# Allegro board Chassis_GND_REF.brd
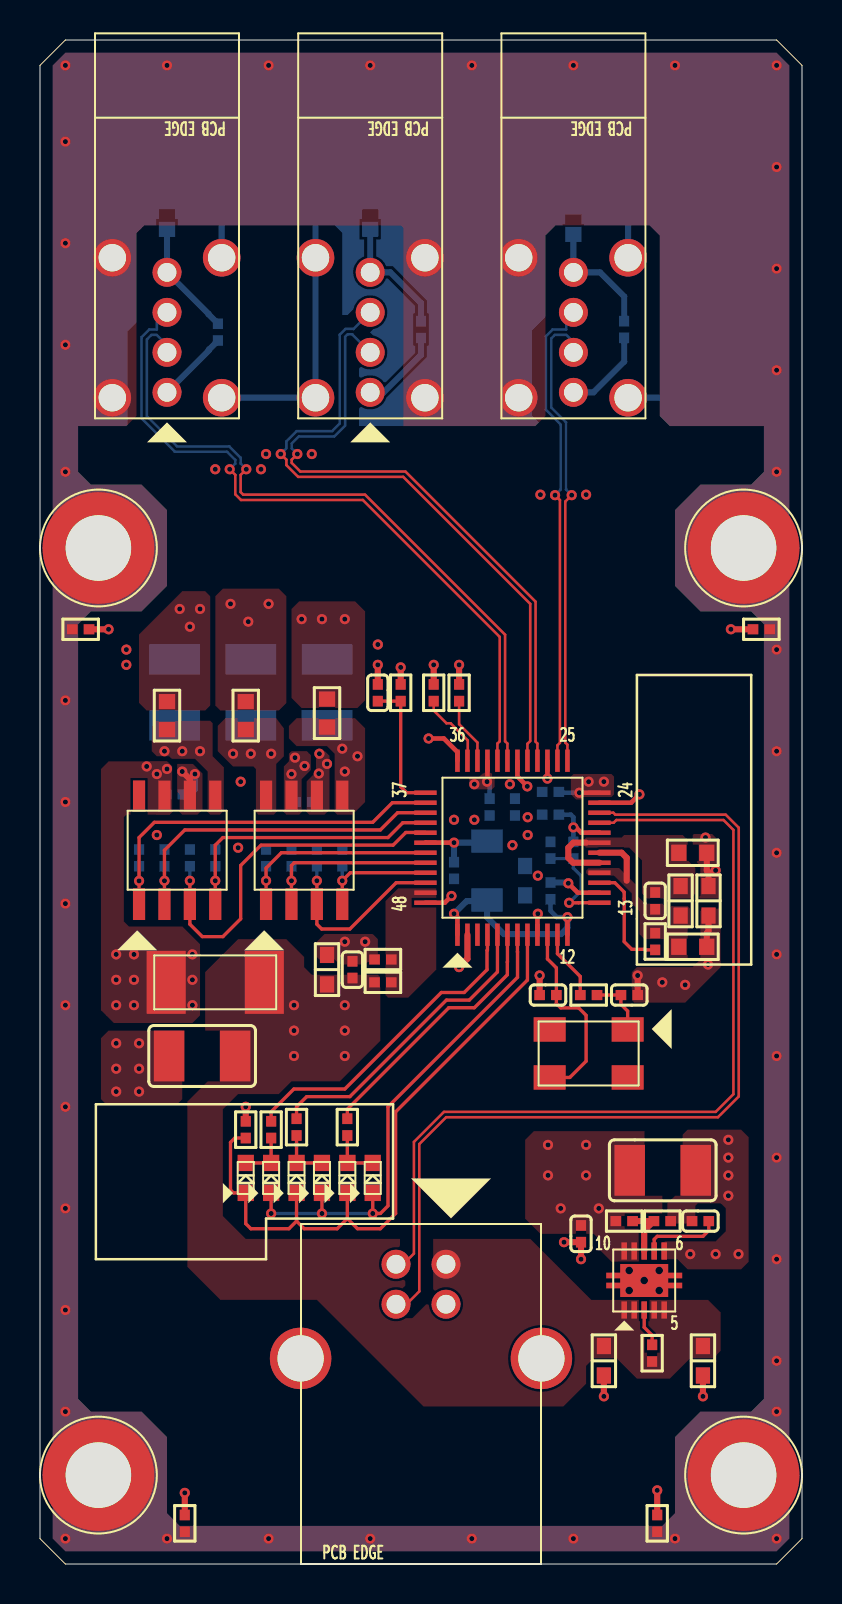
[diagram p0: board, top side]
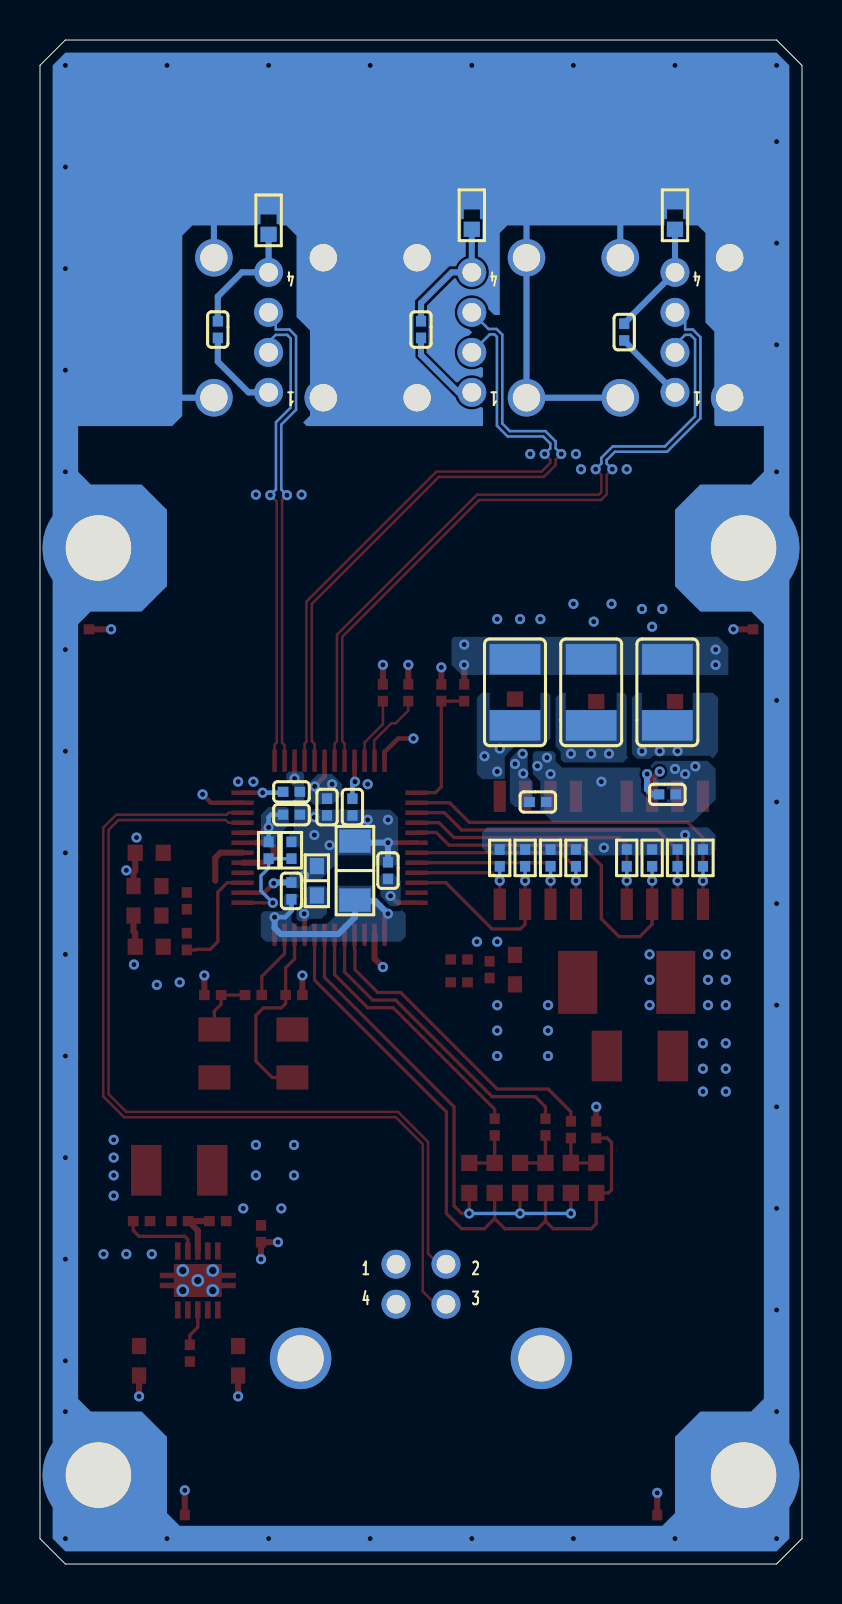
[diagram p1: board, bottom side, seen from below]

Outline 38.1 x 76.2 mm; copper layers: TOP, L2_GND, L3_PWR, BOTTOM. Coordinates in mm from the lower left corner of the outline.
Outline path: 0,74.93 0,1.27 1.27,0 36.83,0 38.1,1.27 38.1,74.93 36.83,76.2 1.27,76.2 0,74.93

## Design rules (mm)
net group USB_D1: nets USB_D1_N USB_D1_P
net group USB_D2: nets USB_D2_N USB_D2_P
net group USB_D3: nets USB_D3_N USB_D3_P
net group USB_D4: nets USB_D4_N USB_D4_P
net group USB_UP: nets USB_UP_N USB_UP_P
net group CLS_PWR: nets LDO_FB VDDOUT_2V5 VFIL1_5V0 VFIL2_5V0 VFIL3_5V0 VPORT1_5V0 VPORT2_5V0 VPORT3_5V0
net group CLS_SENSI: nets AVDD_2V5 AVSS_GND XTAL1 XTAL2 XTAL2_R

## Placement (name value [footprint] x y rotation side)
C1  12pF  [0402C]  25.4 28.45 0 top
C2  10uF  [0603C]  14.35 29.72 270 top
C3  1uF  [0402C]  15.62 29.72 270 top
C4  12pF  [0402C]  29.46 28.45 180 top
C5  1uF  [0402C]  29.21 61.72 270 bottom
C6  1uF  [0402C]  19.05 61.72 270 bottom
C7  10uF  [0603C]  24.26 34.16 270 bottom
C8  1uF  [0402C]  25.53 37.47 0 bottom
C9  1uF  [0402C]  23.75 37.85 90 bottom
C10  1uF  [0402C]  20.7 34.67 270 bottom
C11  1uF  [0402C]  8.89 61.59 270 bottom
C13  22uF  [1206C]  22.35 34.67 270 bottom
C14  4.7uF  [0603C]  33.43 33.16 90 top
C15  4.7uF  [0603C]  32.03 33.16 90 top
C16  1uF  [0402C]  30.76 33.16 90 top
C17  1uF  [0402C]  16.89 43.56 270 top
C18  1uF  [0402C]  13.21 38.1 180 bottom
C19  100uF  [1210C]  10.54 43.58 90 bottom
C20  100uF  [1210C]  14.35 43.58 90 bottom
C21  0.1uF  [0402C]  25.53 33.66 270 bottom
C22  0.1uF  [0402C]  25.53 38.61 0 bottom
C23  0.1uF  [0402C]  22.48 37.85 90 bottom
C24  1uF  [0402C]  6.73 38.48 180 bottom
C26  100uF  [1210C]  6.73 43.58 90 bottom
C27  100uF  [1210C]  8.11 25.4 180 top
C28  1uF  [0402C]  27.05 16.51 90 top
C29  100uF  [1210C]  31.14 19.68 0 top
C30  10uF  [0603C]  28.19 10.16 90 top
C31  10uF  [0603C]  33.15 10.16 90 top
C32  DNL_1n0F  [0402C]  33.02 17.14 0 top
CN1  USB_B_RECP  [MOLEX_670688011]  19.05 10.28 0 top
CN2  USB_A_VERT_RECP  [MOLEX_672983091]  26.67 58.58 180 top
CN3  USB_A_VERT_RECP  [MOLEX_672983091]  16.51 58.58 180 top
CN4  USB_A_VERT_RECP  [MOLEX_672983091]  6.35 58.58 180 top
D1  LED_GRN_0603  [SMTLED_0603]  16.64 19.3 90 top
D2  LED_GRN_0603  [SMTLED_0603]  15.37 19.3 90 top
D3  LED_GRN_0603  [SMTLED_0603]  14.1 19.3 90 top
D4  LED_GRN_0603  [SMTLED_0603]  12.83 19.3 90 top
D5  LED_GRN_0603  [SMTLED_0603]  11.56 19.3 90 top
D6  LED_GRN_0603  [SMTLED_0603]  10.29 19.3 90 top
F1  2A_125V  [FUSE_SMD]  8.76 29.08 180 top
FB1  60OHM_100MHZ_1A  [0603L]  32.64 35.56 180 top
FB2  60OHM_100MHZ_1A  [0603L]  32.64 30.86 180 top
FB4  60OHM_100MHZ_1A  [0603L]  14.35 42.55 90 top
FB5  60OHM_100MHZ_1A  [0603L]  6.35 67.44 270 bottom
FB6  60OHM_100MHZ_1A  [0603L]  10.29 42.42 90 top
FB7  60OHM_100MHZ_1A  [0603L]  16.51 67.44 270 bottom
FB8  60OHM_100MHZ_1A  [0603L]  26.67 67.18 270 bottom
FB9  60OHM_100MHZ_1A  [0603L]  6.35 42.42 90 top
MH1  DNL  [MH_129X220_PTH]  2.92 4.45 0 top
MH2  DNL  [MH_129X220_PTH]  35.18 4.45 0 top
MH3  DNL  [MH_129X220_PTH]  35.18 50.8 0 top
MH4  DNL  [MH_129X220_PTH]  2.92 50.8 0 top
NOREF  -  []  -149.86 -106.68 0 top
NOREF#2  -  []  -41.91 -34.29 0 top
R1  33.2  [0402R]  27.43 28.45 180 top
R2  10K  [0402R]  17.14 29.08 180 top
R3  15K  [0402R]  17.14 30.23 0 top
R4  0  [0402R]  26.67 35.69 90 bottom
R5  DNL_0  [0402R]  25.53 35.69 270 bottom
R6  10K  [0402R]  10.29 21.72 270 top
R7  470  [0402R]  15.37 21.84 90 top
R8  470  [0402R]  12.83 21.84 90 top
R9  470  [0402R]  11.56 21.72 90 top
R11  2.43K  [0402R]  30.76 31.13 90 top
R12  10K  [0402R]  18.03 43.56 90 top
R13  510K  [0402R]  15.11 35.31 90 bottom
R14  510K  [0402R]  11.3 35.31 90 bottom
R15  10K  [0402R]  13.84 35.31 90 bottom
R16  10K  [0402R]  12.57 35.31 90 bottom
R17  510K  [0402R]  8.76 35.31 90 bottom
R18  510K  [0402R]  4.95 35.31 90 bottom
R19  10K  [0402R]  7.49 35.31 90 bottom
R20  10K  [0402R]  6.22 35.31 90 bottom
R21  3.57K  [0402R]  29.21 17.14 180 top
R22  1.15K  [0402R]  31.11 17.14 180 top
R23  10K  [0402R]  30.61 10.54 270 top
R24  0  [0402R]  19.68 43.56 270 top
R25  0  [0402R]  20.95 43.56 270 top
R26  0  [0402R]  7.24 2.03 270 top
R27  0  [0402R]  30.86 2.03 270 top
R28  0  [0402R]  36.07 46.74 0 top
R29  0  [0402R]  2.03 46.74 180 top
U1  UPD720114_QFP  [NEC_TQFP_48]  23.62 35.81 0 top
U2  AP1212  [DIODES_SOP_8L]  13.21 35.69 0 top
U3  AP1212  [DIODES_SOP_8L]  6.86 35.69 0 top
U4  TPS74801  [TI_SON_10]  30.21 14.17 0 top
X1  30MHZ_50PPM  [XTAL_VXM5]  27.43 25.53 180 top

## Library data of the parts
C1 C4 = C_12PF_0402_50V_5P_1500-1206
C2 C7 C30 C31 = C_10UF_0603_6V3_20P_1500-1141
C3 C5 C6 C8-C11 C16-C18 C24 C28 = C_1UF_0402_6V3_10P_1500-1146
C13 = C_22UF_1206_6V3_10P_1500-1097
C14 C15 = C_4U7F_0603_6V3_15P_1500-1207
C19 C20 C26 C27 C29 = C_100UF_1210_6V3_20P_1500-1194
C21-C23 = C_0U1F_0402_16V_10P_1500-1135
C32 = C_0402_16V_20P_X7R_1n0F
CN1 = 3000-1393_USB_B_RECP
CN2-CN4 = 3000-1394_USB_A_VERT_RECP
D1-D6 = LED_0603_GRN_3100-1045
F1 = FUSE_2A_125V_NANO_2300-1027
FB1 FB2 FB4-FB9 = FB_0603_60OHM_1A_2100-1019
MH1-MH4 = MH_129x220_PTH
R1 = R_33R2_0402_1P_1000-1380
R2 R6 R12 R15 R16 R19 R20 R23 = R_10K_0402_1P_1000-1234
R3 = R_15K_0402_5P_1000-1505
R4 R5 R24-R29 = R_0_0402_5P_1000-1377
R7-R9 = R_470_0402_5P_1000-1506
R11 = R_2K43_0402_1P_1000-1503
R13 R14 R17 R18 = R_510K_0402_5P_1000-1504
R21 = R_3K57_0402_1P_1000-1344
R22 = R_1K15_0402_1P_1000-1345
U1 = 4000-1384_UPD720114_TQFP48
U2 U3 = 4000-1385_AP1212L_SOL8L
U4 = IC_TPS74801_SON10_3X3_ADJ_REG
X1 = XTAL_30MHZ_4P_VXM5_1900-1069

## Footprints (pads in the part's own frame, mm; a bottom-side part is the same pattern mirrored in y, then rotated)
0402C
  rect 0.533x0.508 smd: 1(0.419,0) 2(-0.419,0)
0402R
  rect 0.533x0.508 smd: 1(0.419,0) 2(-0.419,0)
0603C
  rect 0.813x0.711 smd: 1(0.737,0) 2(-0.737,0)
0603L
  rect 0.762x0.813 smd: 1(-0.7,0) 2(0.7,0)
1206C
  rect 1.168x1.575 smd: 1(1.473,0) 2(-1.473,0)
1210C
  rect 1.524x2.54 smd: 1(-1.651,0) 2(1.651,0)
DIODES_SOP_8L
  rect 0.61x1.575 smd: 1(-1.905,-2.7) 2(-0.635,-2.7) 3(0.635,-2.7) 4(1.905,-2.7) 5(1.905,2.7) 6(0.635,2.7) 7(-0.635,2.7) 8(-1.905,2.7)
FUSE_SMD
  rect 1.956x3.15 smd: 1(-2.451,0) 2(2.451,0)
MH_129X220_PTH
  round 5.588 hole 3.277: 1(0,0)
MOLEX_670688011
  round 1.448 hole 0.94: 1(1.25,4.71) 2(-1.25,4.71) 3(-1.25,2.71) 4(1.25,2.71)
  round 3.073 hole 2.311: 5(-6.02,0) 6(6.02,0)
MOLEX_672983091
  round 1.448 hole 0.94: 1(0,0) 2(0,-2) 3(0,-4) 4(0,-6)
  round 1.88 hole 1.372: 5(-2.735,0.27) 6(-2.735,-6.73) 7(2.735,-6.73) 8(2.735,0.27)
NEC_TQFP_48
  rect 0.229x1.118 smd: 1(-2.75,-4.35) 2(-2.25,-4.35) 3(-1.75,-4.35) 4(-1.25,-4.35) 5(-0.75,-4.35) 6(-0.25,-4.35) 7(0.25,-4.35) 8(0.75,-4.35) 9(1.25,-4.35) 10(1.75,-4.35) 11(2.25,-4.35) 12(2.75,-4.35) 25(2.75,4.35) 26(2.25,4.35) 27(1.75,4.35) 28(1.25,4.35) 29(0.75,4.35) 30(0.25,4.35) 31(-0.25,4.35) 32(-0.75,4.35) 33(-1.25,4.35) 34(-1.75,4.35) 35(-2.25,4.35) 36(-2.75,4.35)
  rect 1.118x0.229 smd: 13(4.35,-2.75) 14(4.35,-2.25) 15(4.35,-1.75) 16(4.35,-1.25) 17(4.35,-0.75) 18(4.35,-0.25) 19(4.35,0.25) 20(4.35,0.75) 21(4.35,1.25) 22(4.35,1.75) 23(4.35,2.25) 24(4.35,2.75) 37(-4.35,2.75) 38(-4.35,2.25) 39(-4.35,1.75) 40(-4.35,1.25) 41(-4.35,0.75) 42(-4.35,0.25) 43(-4.35,-0.25) 44(-4.35,-0.75) 45(-4.35,-1.25) 46(-4.35,-1.75) 47(-4.35,-2.25) 48(-4.35,-2.75)
SMTLED_0603
  rect 0.813x0.813 smd: 1(-0.749,0) 2(0.749,0)
TI_SON_10
  rect 0.279x0.864 smd: 1(-1,-1.475) 2(-0.5,-1.475) 3(0,-1.475) 4(0.5,-1.475) 5(1,-1.475) 6(1,1.475) 7(0.5,1.475) 8(0,1.475) 9(-0.5,1.475) 10(-1,1.475)
  custom 3.8x1.65 smd: 11(0,0)
XTAL_VXM5
  rect 1.6x1.219 smd: 1(-1.95,-1.2) 2(1.95,-1.2) 3(1.95,1.2) 4(-1.95,1.2)

## Nets
AVDD_2V5: C15.1 C16.1 FB1.2 U1.17(AVDD#17) U1.19(AVDD#19)
AVSS_GND: C15.2 C16.2 FB2.2 R11.1 U1.16(AVSS(R)) U1.18(AVSS)
GND: C1.2 C2.2 C3.2 C4.2 C5.2 C6.2 C7.2 C8.2 C9.2 C10.2 C11.2 C13.2 C14.2 C17.2 C18.2 C19.2 C20.2 C21.2 C22.2 C23.2 C24.2 C26.2 C27.2 C28.2 C29.2 C30.2 C31.2 C32.2 CN1.4(GND) CN1.5(FG1) CN1.6(FG2) CN2.4(GND) CN3.4(GND) CN4.4(GND) FB2.1 FB5.2 FB7.2 FB8.2 R3.2 R5.2 R6.2 R22.2 R24.2 R25.2 R26.2 R27.2 R28.2 R29.2 U1.2(VSSREG) U1.14(TEST) U1.23(VSS#23) U1.27(VSS#27) U1.36(VSS#36) U1.42(VSS#42) U2.6(GND) U3.6(GND) U4.6(GND) U4.11(PAD)
VBUS_5V0: C2.1 C3.1 C27.1 C30.1 C31.1 CN1.1(VBUS) F1.1 R2.1 R23.1 U4.1(VIN1) U4.2(VIN2) U4.4(BIAS) U4.5(EN)
VBUS_MON: R2.2 R3.1 U1.47(VBUSM)
VDD_3V3: C7.1 C8.1 C9.1 C10.1 C28.1 C29.1 R4.1 R12.1 R13.1 R14.1 R15.1 R16.1 R17.1 R18.1 R19.1 R20.1 R21.1 U1.9(VDD33#9) U1.20(VDD33#20) U1.30(VDD33#30) U1.48(VDD33REG) U4.9(VOUT2) U4.10(VOUT1)
VDDOUT_2V5: C13.1 C14.1 C21.1 C22.1 C23.1 FB1.1 U1.1(VDD25OUT) U1.12(VDD25#12) U1.24(VDD25#24) U1.33(VDD25#33)
BUS_B: R4.2 R5.1 U1.13(BUS_B)
CHASSIS_GND: CN2.5(FG1) CN2.6(FG2) CN2.7(FG3) CN2.8(FG4) CN3.5(FG1) CN3.6(FG2) CN3.7(FG3) CN3.8(FG4) CN4.5(FG1) CN4.6(FG2) CN4.7(FG3) CN4.8(FG4) FB5.1 FB7.1 FB8.1 MH1.1 MH2.1 MH3.1 MH4.1 R26.1 R27.1 R28.1 R29.1
LDO_FB: R21.2 R22.1 U4.8(FB)
LDO_PG: R23.2 U4.3(PGD)
LDO_SS: C32.1 U4.7(SS)
LED1: R7.1 U1.6(LED1)
LED1_R: D1.2(CATHODE) D2.2(CATHODE) R7.2
LED2: R8.1 U1.5(LED2)
LED2_R: D3.2(CATHODE) D4.2(CATHODE) R8.2
LED3: R9.1 U1.4(LED3)
LED3_R: D5.2(CATHODE) D6.2(CATHODE) R9.2
LED_AMBER: D2.1(ANODE) D4.1(ANODE) D6.1(ANODE) R6.1 U1.8(AMBER)
LED_GREEN: D1.1(ANODE) D3.1(ANODE) D5.1(ANODE) U1.7(GREEN)
RREF: R11.2 U1.15(RREF)
SYSRST_L: C17.1 R12.2 U1.37(SYSRSTB)
USB1_CS_L: R15.2 U1.46(CSB1) U2.3(FLG2)
USB1_EN_L: R13.2 U1.45(PPB1) U2.4(EN2_L)
USB2_CS_L: R16.2 U1.44(CSB2) U2.2(FLG1)
USB2_EN_L: R14.2 U1.43(PPB2) U2.1(EN1_L)
USB3_CS_L: R19.2 U1.41(CSB3) U3.3(FLG2)
USB3_EN_L: R17.2 U1.40(PPB3) U3.4(EN2_L)
USB4_CS_L: R20.2 U1.39(CSB4) U3.2(FLG1)
USB4_EN_L: R18.2 U1.38(PPB4) U3.1(EN1_L)
USB_D1_N: CN2.2(D_N) U1.25(DM1)
USB_D1_P: CN2.3(D_P) U1.26(DP1)
USB_D2_N: CN3.2(D_N) U1.28(DM2)
USB_D2_P: CN3.3(D_P) U1.29(DP2)
USB_D3_N: CN4.2(D_N) U1.31(DM3)
USB_D3_P: CN4.3(D_P) U1.32(DP3)
USB_D4_N: R25.1 U1.34(DM4)
USB_D4_P: R24.1 U1.35(DP4)
USB_UP_N: CN1.2(D_N) U1.21(DMU)
USB_UP_P: CN1.3(D_P) U1.22(DPU)
VFIL1_5V0: C5.1 CN2.1(VBUS) FB4.2
VFIL2_5V0: C6.1 CN3.1(VBUS) FB6.2
VFIL3_5V0: C11.1 CN4.1(VBUS) FB9.2
VPORT1_5V0: C20.1 FB4.1 U2.5(OUT2)
VPORT2_5V0: C19.1 FB6.1 U2.8(OUT1)
VPORT3_5V0: C26.1 FB9.1 U3.5(OUT2)
VPORT_5V0: C18.1 C24.1 F1.2 U2.7(IN) U3.7(IN)
XTAL1: C1.1 U1.10(X1) X1.3(X2)
XTAL2: R1.1 U1.11(X2)
XTAL2_R: C4.1 R1.2 X1.1(X1)

Pads without a net: U1 3; U3 8; X1 2 4

## Via types
v1: diameter 0.508, hole 0.254, TOP to BOTTOM, 180 vias
v2: diameter 0.635, hole 0.381, TOP to BOTTOM, 5 vias

## Routing (per net, layer and track width the routed paths; a pad name or vN(x,y) marks a point on that pad's centre or on a via; arc(x,y) is an arc through that point)
AVDD_2V5: length 3.2
  TOP w0.305: U1.17 26.66,35.06 26.42,35.31 26.42,35.81 26.67,36.07 27.3,36.07
AVSS_GND: length 2.6
  TOP w0.305: U1.18 29.08,35.56 29.34,35.31 29.34,34.16
GND: length 50.2
  TOP w0.229: v1(19.43,41.27) 20.19,41.27 20.87,40.6 U1.36 ; U1.27 v1(25.37,39.27) ; U1.23 29.55,38.06 v1(29.97,38.48) ; U1.14 26.89,33.56 v1(26.42,34.04) ; v1(20.7,36.07) 19.28,36.07 U1.42
  TOP w0.305: v1(7.11,39.62) 7.49,39.24 U3.6 ; R25.2 v1(20.95,44.96) ; C31.2 v1(33.15,8.38) ; C4.2 v1(29.88,29.43) ; C30.2 v1(28.19,8.38) ; R6.2 v1(10.29,22.86) ; R29.2 v1(3.43,46.74) ; U1.2 21.37,30.26 v1(20.95,29.84) ; C14.2 33.43,31.63 33.34,31.55 FB2.1 ; R28.2 v1(34.54,46.74) ; v1(27.05,15.24) C28.2 v1(26.2,16.09) ; R27.2 v1(30.86,3.68) ; R26.2 v1(7.24,3.56) ; C17.2 v1(16.89,44.96) ; C1.2 v1(24.98,29.43) ; R24.2 v1(19.68,44.96)
  BOTTOM w0.305: C10.2 v1(20.7,36.07) 22.28,36.07 C13.2 ; FB5.2 CN4.4 8.44,62.49 8.44,62.48 8.89,62.03 C11.2 ; FB7.2 CN3.4 17.51,64.58 19.05,63.05 C6.2 ; FB8.2 CN2.4 28,64.58 29.21,63.37 C5.2 ; C24.2 7.49,38.48 7.75,38.73 v1(7.75,39.5) ; C21.2 26.38,34.07 v1(26.42,34.04)
  vias: v1(3.81,26.04) v1(3.81,24.77) v1(3.81,23.62) v1(4.32,45.72) v1(4.32,44.96) v1(4.95,26.04) v1(4.95,24.77) v1(4.95,23.62) v1(8.76,54.74) v1(11.05,54.74) v1(11.3,55.5) v1(13.59,55.5) v1(13.94,39.52) v1(13.97,40.51) v1(14.35,40.01) v1(15.24,31.11) v1(16.26,31.11) v1(16.89,45.97) v1(20.7,37.21) v1(21.72,37.21) v1(23.62,35.94) v1(24.38,37.34) v1(24.38,36.45) v1(24.89,34.42) v1(25.02,53.47) v1(27.3,53.47) v1(31.11,29.08) v1(32.26,28.96) v1(32.51,15.49) v1(33.4,29.97) v1(33.78,15.49) v1(34.42,21.21) v1(34.42,20.32) v1(34.42,19.43) v1(34.42,18.41) v1(34.92,15.49) v2(29.46,14.68) v2(29.46,13.67) v2(30.21,14.17) v2(30.96,14.68) v2(30.96,13.67)
VBUS_5V0:
  vias: v1(12.7,27.94) v1(12.7,26.67) v1(12.7,25.4) v1(15.24,27.94) v1(15.24,26.67) v1(15.24,25.4)
VDD_3V3: length 8.3
  TOP w0.229: U1.48 20.24,33.06 v1(20.57,33.4) ; v1(24.36,38.88) 23.87,39.37 U1.30 ; v1(24.89,32.51) 24.87,32.49 U1.9 ; U1.20 27.97,36.57 27.06,36.57 26.8,36.83 v1(26.67,36.83)
  TOP w0.305: R12.1 v1(18.03,44.83)
  BOTTOM w0.229: C8.1 26.54,37.47 26.67,37.34 v1(26.67,36.83) R4.1
  vias: v1(5.84,36.45) v1(9.91,35.81) v1(23.5,38.99) v1(25.4,20.95) v1(25.4,19.43) v1(26.04,17.78) v1(27.3,20.95) v1(27.3,19.43) v1(27.94,17.78)
VDDOUT_2V5: length 17.1
  TOP w0.229: U1.1 20.87,32.34 v1(20.7,32.51) ; U1.24 v1(26.97,38.56) ; U1.33 22.37,39.26 22.35,39.24 v1(22.35,39.12) ; U1.12 v1(26.37,32.34)
  TOP w0.305: C14.1 33.43,34.58 33.34,34.67 FB1.1
  BOTTOM w0.229: C23.1 22.48,38.99 v1(22.35,39.12) ; v1(26.97,38.56) 25.99,38.56 C22.1 ; v1(26.37,32.34) 25.84,32.34 25.53,32.65 C21.1
  BOTTOM w0.305: v1(26.37,32.34) 26.37,31.81 26.06,31.5 23.19,31.5 22.35,32.33 C13.1 22.3,33.15 21.34,33.15 v1(20.7,32.51)
  vias: v1(21.72,38.99) v1(27.43,39.12) v1(28.19,39.12) v1(33.27,36.32) v1(33.78,34.68)
BUS_B: length 5.3
  TOP w0.165: v1(26.46,33.06) 26.92,33.06 26.92,33.06 U1.13
  BOTTOM w0.165: v1(26.46,33.06) 27.05,33.66 27.05,34.41 26.67,34.79 R4.2 R5.1
CHASSIS_GND: length 22.5
  BOTTOM w0.305: 9.07,68 9.09,67.98 CN4.6 ; 32.16,58.17 32.01,58.31 CN2.5 ; CN4.5 CN3.8 CN3.7 13.77,67.91 13.77,67.92 ; CN2.6 29.41,67.95 29.34,68.02
  vias: v1(1.27,74.93) v1(1.27,71.12) v1(1.27,66.04) v1(1.27,60.96) v1(1.27,54.61) v1(1.27,43.18) v1(1.27,38.1) v1(1.27,33.02) v1(1.27,27.94) v1(1.27,22.86) v1(1.27,17.78) v1(1.27,12.7) v1(1.27,7.62) v1(1.27,1.27) v1(6.35,74.93) v1(6.35,1.27) v1(11.43,74.93) v1(11.43,1.27) v1(16.51,74.93) v1(16.51,1.27) v1(21.59,74.93) v1(21.59,1.27) v1(26.67,74.93) v1(26.67,1.27) v1(31.75,74.93) v1(31.75,1.27) v1(36.83,74.93) v1(36.83,69.85) v1(36.83,64.77) v1(36.83,59.69) v1(36.83,54.61) v1(36.83,45.72) v1(36.83,40.64) v1(36.83,35.56) v1(36.83,30.48) v1(36.83,25.4) v1(36.83,20.32) v1(36.83,15.24) v1(36.83,10.16) v1(36.83,7.62) v1(36.83,1.27)
LDO_FB: length 2.8
  TOP w0.305: U4.8 30.21,16.66 30.23,16.68 30.23,16.69 30.68,17.14 ; 30.68,17.14 R22.1 ; 30.68,17.14 R21.2
LDO_PG: length 1.9
  TOP w0.165: R23.2 30.61,11.44 30.21,11.83 U4.3
LDO_SS: length 4
  TOP w0.165: U4.7 30.71,16.23 30.86,16.38 33.15,16.38 33.4,16.64 33.4,16.64 33.44,16.68 C32.1
LED1: length 13.3
  TOP w0.165: R7.1 15.37,22.74 20.44,27.81 21.72,27.81 23.37,29.46 23.37,30.1 23.37,30.1 U1.6
LED1_R: length 2.6
  TOP w0.165: D1.2 D2.2 R7.2
LED2: length 15.3
  TOP w0.165: U1.5 22.87,29.6 21.46,28.19 20.32,28.19 15.49,23.37 13.34,23.37 12.83,22.86 R8.1
LED2_R: length 2.6
  TOP w0.165: D3.2 D4.2 R8.2
LED3: length 16
  TOP w0.165: U1.4 22.37,30.7 22.35,30.68 22.35,29.72 21.21,28.57 20.07,28.57 15.24,23.75 12.69,23.75 11.56,22.61 R9.1
LED3_R: length 2.5
  TOP w0.165: D6.2 D5.2 R9.2
LED_AMBER: length 33.6
  TOP w0.165: 15.37,17.27 15.88,16.76 17.02,16.76 17.78,17.53 17.78,22.61 24.37,29.2 U1.8 ; 15.37,17.27 D2.1 ; 15.37,17.27 14.86,16.76 13.21,16.76 12.83,17.14 ; D4.1 12.83,17.14 ; 12.83,17.14 12.45,16.76 10.54,16.76 10.29,17.02 D6.1 9.67,18.55 9.53,18.7 9.53,21.08 9.74,21.3 R6.1
LED_GREEN: length 25.3
  TOP w0.165: U1.7 23.87,30.61 23.88,30.61 23.88,29.34 17.4,22.86 17.4,17.91 17.02,17.53 16.89,17.53 v1(16.64,17.53) D1.1 ; D5.1 v1(11.56,17.53) ; D3.1 v1(14.1,17.53)
  BOTTOM w0.165: v1(11.56,17.53) v1(14.1,17.53) v1(16.64,17.53)
RREF: length 5.6
  TOP w0.165: U1.15 28.74,34.06 29.21,33.59 29.21,33.27 29.21,31.11 29.59,30.73 30.27,30.73 30.3,30.71 R11.2
SYSRST_L: length 6.8
  TOP w0.165: U1.37 19.27,38.57 18.33,38.57 18.03,38.86 R12.2 C17.1
USB1_CS_L: length 9.4
  TOP w0.165: v1(13.84,34.16) U2.3 13.84,31.99 14.08,31.75 15.49,31.75 17.81,34.06 U1.46
  BOTTOM w0.165: v1(13.84,34.16) R15.2
USB1_EN_L: length 6.2
  TOP w0.165: U1.45 15.51,34.56 v1(15.11,34.16) U2.4
  BOTTOM w0.165: R13.2 v1(15.11,34.16)
USB2_CS_L: length 9.4
  TOP w0.165: U2.2 v1(12.57,34.16) 12.57,34.92 12.71,35.06 U1.44
  BOTTOM w0.165: v1(12.57,34.16) R16.2
USB2_EN_L: length 10.8
  TOP w0.165: U2.1 v1(11.3,34.16) 11.3,34.8 12.07,35.56 U1.43
  BOTTOM w0.165: v1(11.3,34.16) R14.2
USB3_CS_L: length 18.7
  TOP w0.165: v1(7.49,34.16) U3.3 7.49,31.99 8.11,31.37 9.14,31.37 10.03,32.26 10.03,34.92 11.05,35.94 17.65,35.94 18.29,36.58 19.26,36.58 U1.41
  BOTTOM w0.165: v1(7.49,34.16) R19.2
USB3_EN_L: length 14.7
  TOP w0.165: U3.4 v1(8.76,34.16) 8.76,35.94 9.14,36.32 17.4,36.32 18.14,37.06 U1.40
  BOTTOM w0.165: v1(8.76,34.16) R17.2
USB4_CS_L: length 17.3
  TOP w0.165: U1.39 17.88,37.56 17.02,36.7 7.24,36.7 6.22,35.69 v1(6.22,34.16) U3.2
  BOTTOM w0.165: v1(6.22,34.16) R20.2
USB4_EN_L: length 19.1
  TOP w0.165: U3.1 v1(4.95,34.16) 4.95,36.32 5.71,37.08 16.64,37.08 17.62,38.06 U1.38
  BOTTOM w0.165: v1(4.95,34.16) R18.2
USB_D1_N: length 23.6
  TOP w0.127: U1.25 26.37,40.96 26.26,41.07 26.26,53.12 v1(26.58,53.44)
  BOTTOM w0.127: CN2.2 26.67,61.1 26.31,61.46 25.74,61.46 25.57,61.28 25.57,57.82 26.3,57.08 26.3,53.72 v1(26.58,53.44)
USB_D1_P: length 24
  TOP w0.127: v1(25.75,53.44) 26,53.2 26,41.06 25.87,40.93 U1.26
  BOTTOM w0.127: v1(25.75,53.44) 26.04,53.72 26.04,56.97 25.3,57.71 25.3,61.39 25.63,61.72 26.31,61.72 26.31,62.23 CN2.3
USB_D2_N: length 33.4
  TOP w0.127: v1(12.87,55.5) 12.59,55.22 12.59,55.05 13.02,54.62 18.27,54.62 24.78,48.12 24.78,41.12 24.87,41.02 U1.28
  BOTTOM w0.127: v1(12.87,55.5) 12.59,55.78 12.59,56.02 12.94,56.38 14.72,56.38 15.25,56.91 15.25,61.36 15.38,61.49 15.61,61.49 CN3.2
USB_D2_P: length 33.9
  TOP w0.127: U1.29 24.37,41.01 24.51,41.15 24.51,48.01 18.16,54.36 12.91,54.36 12.32,54.94 12.32,55.22 v1(12.04,55.5)
  BOTTOM w0.127: v1(12.04,55.5) 12.32,55.78 12.32,56.13 12.83,56.64 14.61,56.64 14.99,57.02 14.99,61.47 15.27,61.75 15.68,61.75 CN3.3
USB_D3_N: length 35.5
  TOP w0.127: v1(10.32,54.74) 10.03,54.45 10.03,53.59 10.16,53.47 16.25,53.47 23.25,46.47 23.25,41.14 23.37,41.02 U1.31
  BOTTOM w0.127: CN4.2 6.35,60.95 5.84,61.46 5.57,61.46 5.35,61.23 5.35,57.39 6.85,55.88 9.46,55.88 10.03,55.31 10.03,55.02 v1(10.32,54.74)
USB_D3_P: length 36
  TOP w0.127: U1.32 22.87,41.02 22.99,41.14 22.99,46.35 16.14,53.2 10.05,53.2 9.77,53.48 9.77,54.45 v1(9.48,54.74)
  BOTTOM w0.127: v1(9.48,54.74) 9.77,55.02 9.77,55.2 9.35,55.61 6.74,55.61 5.08,57.28 5.08,61.34 5.46,61.72 5.84,61.72 5.84,62.07 CN4.3
USB_D4_N: length 3.4
  TOP w0.127: U1.34 21.87,41.07 20.95,41.99 R25.1
USB_D4_P: length 3.8
  TOP w0.127: U1.35 21.39,40.18 21.39,41.18 20.53,42.04 20.32,42.04 19.68,42.67 R24.1
USB_UP_N: length 43.8
  TOP w0.127: U1.21 28.68,37.06 28.82,37.2 34.18,37.2 34.67,36.7 34.67,23.49 33.79,22.61 20.2,22.61 18.7,21.1 18.7,15.52 18.16,14.99 CN1.2
USB_UP_P: length 46.5
  TOP w0.127: CN1.3 18.32,12.99 18.96,13.63 18.96,20.99 20.31,22.34 33.9,22.34 34.94,23.38 34.94,36.81 34.29,37.47 28.76,37.47 28.67,37.56 U1.22
VFIL1_5V0: length 4.4
  BOTTOM w0.305: C5.1 29.21,60.12 27.67,58.58 CN2.1
  vias: v1(13.08,47.24) v1(14.1,47.24) v1(15.24,47.24)
VFIL2_5V0: length 4.2
  BOTTOM w0.305: CN3.1 17.18,58.58 19.05,60.45 C6.1
  vias: v1(9.53,48.01) v1(10.41,47.12) v1(11.43,48.01)
VFIL3_5V0: length 3.6
  BOTTOM w0.305: C11.1 8.89,61.16 8.44,60.71 8.44,60.67 CN4.1
  vias: v1(6.99,47.75) v1(7.49,46.86) v1(8,47.75)
VPORT1_5V0:
  vias: v1(15.11,40.77) v1(15.24,39.62) v1(15.88,40.39)
VPORT2_5V0:
  vias: v1(9.65,40.51) v1(10.54,40.51) v1(11.56,40.51)
VPORT3_5V0:
  vias: v1(6.22,40.64) v1(7.11,40.64) v1(8,40.64)
VPORT_5V0:
  vias: v1(3.81,30.48) v1(3.81,29.21) v1(3.81,27.94) v1(4.7,30.48) v1(4.7,29.21) v1(4.7,27.94) v1(5.33,39.88) v1(5.84,39.5) v1(6.35,39.75) v1(7.62,30.48) v1(7.62,29.21) v1(7.62,27.94) v1(10.03,39.12) v1(12.57,39.5) v1(12.75,40.32) v1(13.23,39.9)
XTAL1: length 9.8
  TOP w0.165: U1.10 25.37,30.25 25.82,29.81 C1.1 25.82,28.02 26.04,27.81 26.93,27.81 27.3,27.43 27.3,25.14 26.49,24.33 X1.3
XTAL2: length 3.5
  TOP w0.165: R1.1 27.01,29.38 25.87,30.52 U1.11
XTAL2_R: length 3.1
  TOP w0.165: R1.2 C4.1 29.04,27.98 29.38,27.65 X1.1

## Copper pours and planes (outline as drawn; the poured copper is in the pictures)
AVDD_2V5 on TOP: 27.3,35.81 29.46,35.81 30.1,35.18 30.1,33.53 30.35,33.27 32.51,33.27 32.77,33.53 32.77,34.8 32.38,35.18 32.38,36.2 32.13,36.45 29.21,36.45 29.08,36.32 27.3,36.32 27.18,36.2 27.18,35.94
AVSS_GND on TOP: 27.43,34.42 28.7,34.42 29.59,33.53 29.59,33.02 29.97,32.64 29.97,31.5 30.23,31.24 31.24,31.24 31.37,31.11 31.37,30.35 31.62,30.1 32.26,30.1 32.38,30.23 32.38,31.75 32.51,31.88 32.51,32.77 32.38,32.89 31.24,32.89 31.11,33.02 30.35,33.02 29.97,33.4 29.97,33.78 28.96,34.8 27.43,34.8 27.3,34.67 27.3,34.54
GND on TOP: 13.34,39.37 13.34,37.59 13.46,37.47 14.22,37.47 14.48,37.72 14.48,39.24 14.61,39.37 14.61,40.39 14.22,40.77 13.84,40.77 13.72,40.64 13.72,39.75
GND on TOP: 31.11,16 31.11,15.37 31.24,15.24 31.88,15.24 32.38,14.73 35.05,14.73 35.43,15.11 35.43,18.54 33.91,18.54 33.91,18.16 34.29,17.78 34.29,16.64 33.78,16.13 31.24,16.13
GND on TOP: 32.13,18.41 32.13,21.46 32.38,21.72 35.05,21.72 35.43,21.34 35.43,18.54 34.92,18.03 32.89,18.03 32.77,17.91 32.77,17.02 31.37,17.02 31.37,18.03 31.75,18.41
GND on TOP: 33.02,32.64 33.02,30.23 32.64,29.84 29.84,29.84 29.59,29.59 29.59,28.19 29.72,28.07 32.26,28.07 34.04,29.84 34.04,32.64 33.91,32.77 33.15,32.77
GND on TOP: 13.97,30.23 14.73,30.23 14.99,29.97 16.26,29.97 16.38,30.1 16.89,30.1 16.89,31.24 16.64,31.5 14.22,31.5 13.84,31.11 13.84,30.35
GND on TOP: 6.99,38.48 6.99,37.59 7.11,37.47 7.87,37.47 8.13,37.72 8.13,39.62 7.62,40.13 6.99,40.13 6.86,40.01 6.86,38.61
GND on TOP: 3.43,26.67 7.11,26.67 7.11,23.24 6.86,22.99 3.3,22.99 3.05,23.24 3.05,26.29
GND on BOTTOM: 20.19,37.34 20.19,35.05 20.32,34.92 23.37,34.92 24.13,34.16 24.77,34.16 25.15,33.78 25.65,33.78 25.65,34.42 25.4,34.67 25.15,34.67 25.02,34.8 25.02,35.69 25.27,35.94 25.65,35.94 25.65,36.45 25.4,36.7 25.4,38.23 25.27,38.35 25.27,38.73 25.78,39.24 25.78,39.5 25.65,39.62 25.02,39.62 24.89,39.5 24.89,37.97 24.64,37.72 20.57,37.72
GND on BOTTOM: 13.72,40.51 13.72,39.37 13.46,39.12 13.46,37.85 14.35,37.85 14.61,38.1 14.61,40.26 14.22,40.64 13.84,40.64
GND on BOTTOM: 3.68,45.85 3.68,44.45 17.02,44.45 17.53,44.96 17.53,46.23 17.4,46.35 4.19,46.35
GND on L2_GND: 7.62,2.54 6.99,3.17 6.99,6.99 5.71,8.26 3.17,8.26 2.54,8.89 2.54,46.35 3.17,46.99 5.08,46.99 6.99,48.9 6.99,53.34 5.71,54.61 3.17,54.61 2.54,55.24 2.54,55.88 3.17,56.52 4.45,56.52 4.83,56.9 4.83,65.13 5.74,66.04 6.99,66.04 7.62,65.41 7.62,56.52 8.26,55.88 14.61,55.88 14.99,56.26 14.99,65.02 15.75,65.79 17.27,65.79 17.78,65.28 17.78,55.88 24.77,55.88 25.15,56.26 25.15,64.87 26.31,66.04 29.84,66.04 30.48,65.41 30.48,57.15 31.11,56.52 34.92,56.52 35.56,55.88 35.56,55.24 34.92,54.61 32.38,54.61 31.11,53.34 31.11,48.26 32.38,46.99 34.92,46.99 35.56,46.35 35.56,8.89 34.92,8.26 32.38,8.26 31.11,6.99 31.11,3.17 30.48,2.54
VBUS_5V0 on TOP: 8.26,26.04 8.26,29.59 9.91,31.24 12.32,31.24 13.21,30.35 13.21,29.84 13.59,29.46 16.89,29.46 17.02,29.34 17.02,26.16 14.99,24.13 12.57,24.13 11.94,23.5 9.91,23.5 9.14,22.73 9.14,17.4 10.29,16.26 24.51,16.26 27.56,13.21 33.4,13.21 34.04,12.57 34.04,10.67 33.66,10.29 32.51,10.29 31.5,9.27 29.84,9.27 28.83,10.29 27.69,10.29 27.3,9.91 27.3,9.02 26.16,7.87 19.18,7.87 13.84,13.21 9.02,13.21 7.37,14.86 7.37,23.11 8.38,24.13 8.38,25.91
VBUS_5V0 on L3_PWR: 19.81,13.97 21.21,13.97 22.23,14.99 22.23,20.07 17.14,25.15 17.14,27.81 16,28.96 12.19,28.96 11.56,28.32 11.56,24.64 16.76,19.43 17.78,19.43 19.18,18.03 19.18,14.61
VBUS_MON on TOP: 17.4,28.32 17.27,28.45 17.27,33.15 17.91,33.78 19.81,33.78 19.81,29.72 18.41,28.32
VDD_3V3 on TOP: 28.57,15.11 27.94,15.75 27.94,16.26 27.69,16.51 25.02,16.51 24.26,17.27 24.26,21.21 24.89,21.84 30.23,21.84 30.23,20.95 30.48,20.7 31.11,20.7 31.11,16.64 30.99,16.51 30.73,16.51 30.48,16.26 30.48,15.24 30.35,15.11
VDD_3V3 on BOTTOM: 4.57,35.43 15.62,35.43 16,35.81 16,36.58 15.75,36.83 4.7,36.83 4.32,36.45 4.32,35.69
VDD_3V3 on BOTTOM: 20.07,34.16 20.45,34.54 20.95,34.54 21.08,34.42 21.08,33.4 20.57,32.89 20.19,32.89 20.07,33.02
VDD_3V3 on BOTTOM: 22.99,38.48 23.5,37.97 24,37.97 24.01,37.97 24.43,37.97 24.64,38.18 24.64,39.07 24.21,39.5 23.5,39.5 22.99,38.99
VDD_3V3 on BOTTOM: 23.75,33.78 23.75,32.53 24.02,32.26 24.64,32.26 24.77,32.13 25.15,32.13 25.27,32.26 25.27,32.89 24.77,33.4 24.77,33.78 24.64,33.91 23.88,33.91
VDD_3V3 on BOTTOM: 25.65,37.72 25.65,36.96 26.29,36.33 26.29,35.94 26.42,35.81 26.92,35.81 27.05,35.94 27.05,37.47 26.67,37.85 25.78,37.85
VDD_3V3 on L3_PWR: 14.87,50.7 14.97,51.07 15.34,51.17 15.37,51.16 16.79,52.58 31.11,52.58 31.11,48.26 32.38,46.99 34.92,46.99 35.56,46.35 35.56,8.89 34.92,8.26 32.38,8.26 31.11,6.99 31.11,3.17 30.48,2.54 7.62,2.54 6.99,3.17 6.99,6.99 5.71,8.26 3.17,8.26 2.54,8.89 2.54,46.35 3.17,46.99 5.08,46.99 6.99,48.9 6.99,52.58 8.76,52.58 8.76,50.9 8.83,50.8 8.94,50.83 10.69,52.58 13.19,52.58 12.57,51.96 12.57,51.28 12.61,51.21 12.68,51.18 13.08,50.8 12.68,50.42 12.61,50.39 12.57,50.32 12.57,48.61 12.64,48.52 12.75,48.54 14.88,50.67
VDDOUT_2V5 on TOP: 32.64,36.45 32.64,35.05 32.89,34.8 32.89,33.4 33.02,33.27 34.04,33.27 34.16,33.4 34.16,35.94 33.53,36.58 32.77,36.58
VDDOUT_2V5 on TOP: 22.23,40.77 22.48,40.77 22.61,40.64 22.61,39.37 22.73,39.24 22.73,38.86 22.61,38.73 21.59,38.73 21.46,38.86 21.46,39.24 21.59,39.37 21.97,39.37 22.23,39.62
VDDOUT_2V5 on TOP: 28.57,38.35 27.18,38.35 27.05,38.23 26.8,38.23 26.54,38.48 26.54,39.37 26.67,39.5 28.57,39.5 28.7,39.37 28.7,38.48
VDDOUT_2V5 on BOTTOM: 20.07,32.77 20.45,32.77 21.34,33.66 21.34,33.93 21.44,34.03 23.24,34.03 23.37,33.91 23.37,32.38 23.75,32 25.15,32 25.4,32.26 25.4,32.89 25.15,33.15 25.15,33.4 25.27,33.53 25.78,33.53 25.91,33.4 25.91,32.77 26.04,32.64 26.92,32.64 27.06,32.5 27.06,31.37 26.8,31.11 20.07,31.11 19.81,31.37 19.81,32.51
VDDOUT_2V5 on L3_PWR: 19.81,32.51 19.81,31.24 20.57,30.48 32.38,30.48 34.29,32.38 34.29,35.94 28.7,41.53 23.5,41.53 21.46,39.5 21.46,38.87 21.59,38.73 22.48,38.73 23.5,39.75 25.91,39.75 26.54,39.12 26.54,38.23 26.67,38.1 28.45,38.1 28.45,33.78 27.43,32.77 26.16,32.77 25.27,31.88 24.13,31.88 23.24,32.77 20.07,32.77
CHASSIS_GND on BOTTOM (solid shape): 37.47,74.93 37.47,1.27 36.83,0.64 1.27,0.64 0.64,1.27 0.64,56.9 1.91,56.9 1.91,54.61 2.54,53.98 5.08,53.98 6.35,52.7 6.35,48.9 5.08,47.62 2.54,47.62 1.91,46.99 1.91,8.26 2.54,7.62 5.08,7.62 6.35,6.35 6.35,2.54 6.99,1.91 31.11,1.91 31.75,2.54 31.75,6.35 33.02,7.62 35.56,7.62 36.2,8.26 36.2,46.99 35.56,47.62 33.02,47.62 31.75,48.9 31.75,52.7 33.02,53.98 35.56,53.98 36.2,54.61 36.2,56.9 31.5,56.9 30.99,57.4 30.99,66.42 30.48,66.93 27.2,66.93 27.2,66.99 27.08,66.99 27.08,67.48 26.26,67.48 26.26,66.99 26.14,66.99 26.14,66.93 25.78,66.93 25.27,66.42 25.27,62.35 24.6,61.68 24.6,57.42 24.94,57.07 24.77,56.9 15.95,56.9 15.95,57.75 15.95,57.76 15.96,57.79 15.98,57.82 16,57.83 16.03,57.85 16.06,57.85 16.09,57.84 16.14,57.82 16.21,57.78 16.29,57.76 16.38,57.74 16.46,57.73 16.54,57.73 16.62,57.74 16.7,57.75 16.78,57.78 16.86,57.81 16.94,57.84 17.01,57.89 17.07,57.94 17.13,58 17.18,58.06 17.23,58.13 17.27,58.2 17.31,58.28 17.32,58.33 19.33,60.34 19.33,60.91 19.43,60.91 19.43,62.54 19.36,62.54 19.36,63.17 17.64,64.89 17.3,64.89 17.29,64.92 17.26,65 17.21,65.06 17.17,65.13 17.11,65.19 17.05,65.24 16.99,65.29 16.92,65.33 16.85,65.36 16.82,65.38 16.82,66.23 17.04,66.23 17.04,67.25 16.92,67.25 16.92,67.73 16.1,67.73 16.1,67.25 15.98,67.25 15.98,66.23 16.2,66.23 16.2,65.38 16.17,65.36 16.09,65.33 16.02,65.28 15.96,65.23 15.9,65.17 15.84,65.11 15.79,65.04 15.75,64.97 15.72,64.9 15.69,64.82 15.67,64.74 15.66,64.66 15.66,64.58 15.66,64.49 15.68,64.41 15.7,64.33 15.72,64.25 15.76,64.18 15.8,64.11 15.85,64.04 15.91,63.98 15.97,63.92 16.04,63.88 16.11,63.83 16.18,63.8 16.26,63.77 16.34,63.75 16.42,63.74 16.5,63.73 16.58,63.73 16.67,63.75 16.75,63.76 16.83,63.79 16.9,63.83 16.97,63.87 17.04,63.92 17.1,63.97 17.16,64.03 17.21,64.1 17.25,64.17 17.29,64.24 17.3,64.28 17.39,64.28 18.74,62.92 18.74,62.54 18.67,62.54 18.67,60.91 18.77,60.91 18.77,60.57 17.32,59.12 17.28,59.09 17.26,59.09 17.23,59.09 17.2,59.1 17.14,59.16 17.08,59.21 17.02,59.27 16.95,59.31 16.87,59.35 16.79,59.39 16.71,59.41 16.63,59.43 16.55,59.43 16.46,59.43 16.38,59.42 16.3,59.41 16.22,59.38 16.14,59.35 16.09,59.32 16.06,59.32 16.03,59.32 16,59.33 15.98,59.35 15.96,59.38 15.95,59.4 15.95,59.42 15.95,59.75 15.95,59.76 15.96,59.79 15.98,59.82 16,59.83 16.03,59.85 16.06,59.85 16.09,59.84 16.14,59.82 16.21,59.78 16.29,59.76 16.37,59.74 16.45,59.73 16.53,59.73 16.61,59.74 16.69,59.75 16.77,59.77 16.85,59.8 16.92,59.84 16.99,59.88 17.06,59.93 17.12,59.98 17.17,60.05 17.22,60.11 17.26,60.18 17.3,60.25 17.32,60.33 17.34,60.41 17.36,60.49 17.36,60.57 17.36,60.65 17.35,60.73 17.33,60.81 17.3,60.89 17.27,60.97 17.23,61.04 17.18,61.1 17.13,61.17 17.07,61.22 17.01,61.27 16.94,61.32 16.87,61.36 16.79,61.39 16.72,61.41 16.66,61.42 16.5,61.58 16.66,61.74 16.72,61.76 16.79,61.78 16.87,61.81 16.94,61.85 17.01,61.89 17.07,61.94 17.13,62 17.19,62.06 17.23,62.13 17.27,62.2 17.31,62.28 17.33,62.35 17.35,62.43 17.36,62.52 17.36,62.6 17.36,62.68 17.34,62.76 17.32,62.84 17.29,62.92 17.26,62.99 17.22,63.06 17.17,63.12 17.11,63.19 17.05,63.24 16.99,63.29 16.92,63.33 16.84,63.37 16.77,63.4 16.69,63.42 16.61,63.43 16.52,63.43 16.44,63.43 16.36,63.42 16.28,63.4 16.2,63.38 16.13,63.34 16.06,63.3 15.99,63.26 15.93,63.21 15.87,63.15 15.82,63.08 15.78,63.01 15.74,62.94 15.71,62.87 15.68,62.79 15.67,62.73 15.39,62.45 15.11,62.45 15.11,66.55 14.73,66.93 6.88,66.93 6.88,67.25 6.76,67.25 6.76,67.73 5.94,67.73 5.94,67.25 5.82,67.25 5.82,66.93 5.21,66.93 4.83,66.55 4.83,62.08 4.38,61.63 4.38,56.96 4.32,56.9 0.64,56.9 0.64,74.93 1.27,75.56 36.83,75.56
CHASSIS_GND on L2_GND (solid shape): 37.47,74.93 37.47,1.27 36.83,0.64 1.27,0.64 0.64,1.27 0.64,56.9 1.91,56.9 1.91,54.61 2.54,53.98 5.08,53.98 6.35,52.7 6.35,48.9 5.08,47.62 2.54,47.62 1.91,46.99 1.91,8.26 2.54,7.62 5.08,7.62 6.35,6.35 6.35,2.54 6.99,1.91 31.11,1.91 31.75,2.54 31.75,6.35 33.02,7.62 35.56,7.62 36.2,8.26 36.2,46.99 35.56,47.62 33.02,47.62 31.75,48.9 31.75,52.7 33.02,53.98 35.56,53.98 36.2,54.61 36.2,56.9 31.5,56.9 30.99,57.4 30.99,66.42 30.48,66.93 25.78,66.93 25.27,66.42 25.27,65.36 24.89,64.98 24.89,57.02 24.77,56.9 18.03,56.9 18.03,65.38 17.38,66.04 17.27,66.04 16.26,67.06 14.73,67.06 14.61,66.93 5.21,66.93 4.83,66.55 4.83,65.49 4.57,65.23 4.57,57.15 4.32,56.9 0.64,56.9 0.64,74.93 1.27,75.56 36.83,75.56
CHASSIS_GND on L3_PWR (solid shape): 37.47,74.93 37.47,1.27 36.83,0.64 1.27,0.64 0.64,1.27 0.64,56.9 1.91,56.9 1.91,54.61 2.54,53.98 5.08,53.98 6.29,52.77 6.29,48.83 5.08,47.62 2.54,47.62 1.91,46.99 1.91,8.26 2.54,7.62 5.08,7.62 6.35,6.35 6.35,2.54 6.99,1.91 31.11,1.91 31.75,2.54 31.75,6.35 33.02,7.62 35.56,7.62 36.2,8.26 36.2,46.99 35.56,47.62 33.02,47.62 31.75,48.9 31.75,52.7 33.02,53.98 35.56,53.98 36.2,54.61 36.2,56.9 31.5,56.9 30.99,57.4 30.99,66.42 30.48,66.93 25.78,66.93 25.27,66.42 25.27,59.54 25.15,59.41 25.15,57.28 24.77,56.9 17.75,56.9 17.74,56.9 17.71,56.91 17.68,56.92 17.66,56.95 17.65,56.97 17.65,57 17.65,57.03 17.67,57.06 17.68,57.07 18.03,57.43 18.03,59.41 17.5,59.94 17.26,59.95 17.23,59.97 17.21,59.99 17.2,60.01 17.2,60.04 17.2,60.07 17.24,60.14 17.28,60.21 17.31,60.28 17.33,60.36 17.35,60.44 17.36,60.52 17.36,60.61 17.36,60.69 17.34,60.77 17.32,60.85 17.29,60.93 17.25,61 17.21,61.07 17.16,61.13 17.1,61.19 17.04,61.25 16.98,61.3 16.9,61.34 16.83,61.37 16.75,61.4 16.67,61.42 16.59,61.43 16.51,61.43 16.43,61.43 16.35,61.42 16.27,61.4 16.19,61.37 16.12,61.34 16.04,61.3 15.98,61.25 15.92,61.19 15.86,61.13 15.81,61.07 15.77,61 15.73,60.93 15.7,60.85 15.68,60.77 15.66,60.69 15.66,60.61 15.66,60.52 15.67,60.44 15.69,60.36 15.71,60.28 15.74,60.21 15.78,60.14 15.82,60.07 15.82,60.04 15.82,60.01 15.81,59.99 15.79,59.97 15.76,59.95 15.52,59.94 15.29,59.72 15.28,59.71 15.25,59.69 15.22,59.69 15.19,59.69 15.16,59.7 15.14,59.72 15.12,59.74 15.11,59.77 15.11,59.79 15.11,62.58 15.66,62.58 15.66,62.5 15.67,62.42 15.69,62.34 15.72,62.26 15.76,62.19 15.8,62.12 15.85,62.05 15.9,61.99 15.96,61.93 16.03,61.88 16.1,61.84 16.17,61.8 16.25,61.77 16.33,61.75 16.41,61.74 16.49,61.73 16.57,61.73 16.65,61.74 16.73,61.76 16.81,61.79 16.89,61.82 16.96,61.86 17.03,61.91 17.09,61.96 17.15,62.02 17.2,62.08 17.24,62.15 17.28,62.22 17.31,62.3 17.34,62.38 17.35,62.46 17.36,62.54 17.36,62.62 17.35,62.71 17.34,62.79 17.31,62.87 17.28,62.94 17.24,63.01 17.2,63.08 17.15,63.15 17.09,63.21 17.03,63.26 16.96,63.31 16.89,63.35 16.81,63.38 16.73,63.4 16.65,63.42 16.57,63.43 16.49,63.43 16.41,63.43 16.33,63.41 16.25,63.39 16.17,63.36 16.1,63.33 16.03,63.28 15.96,63.23 15.9,63.18 15.85,63.12 15.8,63.05 15.76,62.98 15.72,62.9 15.69,62.83 15.67,62.75 15.66,62.67 15.66,62.58 15.11,62.58 15.11,64.58 15.66,64.58 15.66,64.5 15.67,64.42 15.69,64.34 15.72,64.26 15.76,64.19 15.8,64.12 15.85,64.05 15.9,63.99 15.96,63.93 16.03,63.88 16.1,63.84 16.17,63.8 16.25,63.77 16.33,63.75 16.41,63.74 16.49,63.73 16.57,63.73 16.65,63.74 16.73,63.76 16.81,63.79 16.89,63.82 16.96,63.86 17.03,63.91 17.09,63.96 17.15,64.02 17.2,64.08 17.24,64.15 17.28,64.22 17.31,64.3 17.34,64.38 17.35,64.46 17.36,64.54 17.36,64.62 17.35,64.71 17.34,64.79 17.31,64.87 17.28,64.94 17.24,65.01 17.2,65.08 17.15,65.15 17.09,65.21 17.03,65.26 16.96,65.31 16.89,65.35 16.81,65.38 16.73,65.4 16.65,65.42 16.57,65.43 16.49,65.43 16.41,65.43 16.33,65.41 16.25,65.39 16.17,65.36 16.1,65.33 16.03,65.28 15.96,65.23 15.9,65.18 15.85,65.12 15.8,65.05 15.76,64.98 15.72,64.9 15.69,64.83 15.67,64.75 15.66,64.67 15.66,64.58 15.11,64.58 15.11,66.55 14.73,66.93 5.21,66.93 4.83,66.55 4.83,59.41 4.7,59.29 4.7,57.28 4.32,56.9 0.64,56.9 0.64,74.93 1.27,75.56 36.83,75.56
CHASSIS_GND on TOP: 1.27,0.64 0.64,1.27 0.64,74.93 1.27,75.56 36.83,75.56 37.47,74.93 37.47,1.27 36.83,0.64 ; 1 cut-out
VFIL1_5V0 on TOP: 12.45,47.62 12.45,43.43 13.08,42.8 15.88,42.8 16.26,43.18 16.26,47.62 15.75,48.13 12.95,48.13
VFIL1_5V0 on L3_PWR: 12.45,47.88 12.45,46.35 12.7,46.1 15.88,46.1 16.26,46.48 16.26,48.64 22.23,54.61 26.29,54.61 28.07,56.39 28.07,59.31 27.69,59.69 25.78,59.69 25.4,59.31 25.4,56.77 24.89,56.26 20.07,56.26 12.57,48.77 12.57,48.01
VFIL2_5V0 on TOP: 8.64,48.26 8.64,43.05 9.02,42.67 11.94,42.67 12.32,43.05 12.32,48.39 11.94,48.77 9.14,48.77
VFIL2_5V0 on L3_PWR: 8.64,50.16 8.64,46.35 8.89,46.1 12.06,46.1 12.32,46.35 12.32,49.28 17.27,54.23 17.27,57.02 17.78,57.53 17.78,59.31 17.4,59.69 15.62,59.69 15.24,59.31 15.24,56.77
VFIL3_5V0 on TOP: 4.95,46.48 4.95,43.05 5.33,42.67 8.26,42.67 8.51,42.93 8.51,48.39 8.26,48.64 7.11,48.64
VFIL3_5V0 on L3_PWR: 4.95,46.1 8.38,46.1 8.51,46.23 8.51,56.77 7.75,57.53 7.75,59.18 7.37,59.56 5.33,59.56 4.95,59.18 4.95,56.13 6.6,54.48 6.54,54.42 6.54,48.07 4.95,46.48
VPORT1_5V0 on TOP: 12.45,41.27 12.45,41.91 12.83,42.29 15.75,42.29 16.26,41.78 16.26,38.1 15.62,37.47 14.86,37.47 14.73,37.59 14.73,40.51 14.35,40.89 12.83,40.89
VPORT1_5V0 on BOTTOM: 12.45,43.31 12.7,43.56 16,43.56 16.26,43.31 16.26,39.5 16,39.24 14.73,39.24 14.73,40.51 14.35,40.89 12.95,40.89 12.45,41.43
VPORT2_5V0 on TOP: 8.89,40.64 8.89,41.91 9.27,42.29 11.81,42.29 12.19,41.78 12.19,40.39 11.81,40.01 11.81,37.59 11.68,37.47 10.92,37.47 10.79,37.59 10.79,39.75 10.67,39.88 9.65,39.88
VPORT2_5V0 on BOTTOM: 8.64,43.31 8.89,43.56 12.06,43.56 12.32,43.31 12.32,40.26 11.81,39.75 9.27,39.75 8.64,40.39
VPORT3_5V0 on TOP: 5.84,42.16 8.51,42.16 8.64,42.04 8.64,40.39 9.19,39.83 9.19,37.66 8.99,37.47 8.51,37.47 8.38,37.59 8.38,39.62 7.75,40.26 5.97,40.26 5.59,40.64 5.59,41.91
VPORT3_5V0 on BOTTOM: 4.45,43.56 8.26,43.56 8.51,43.31 8.51,40.51 8.26,40.26 4.45,40.26 4.19,40.64 4.19,43.31
VPORT_5V0 on TOP: 12.19,37.59 12.32,37.47 12.95,37.47 13.08,37.59 13.08,39.24 13.55,39.71 13.55,40.43 13.34,40.64 12.57,40.64 12.45,40.51 12.45,40.13 12.19,39.88
VPORT_5V0 on TOP: 5.71,37.59 5.84,37.47 6.48,37.47 6.6,37.59 6.6,39.88 6.35,40.13 5.21,40.13 5.07,39.99 5.07,39.52 5.35,39.24 5.59,39.24 5.71,39.12
VPORT_5V0 on TOP: 3.68,27.05 7.62,27.05 8,27.43 8,30.99 7.11,31.88 4.45,31.88 4.19,32.13 4.19,37.34 4.32,37.47 6.48,37.47 6.6,37.59 6.6,39.88 6.35,40.13 3.43,40.13 3.05,39.75 3.05,27.69
VPORT_5V0 on BOTTOM: 4.32,39.75 4.32,38.23 5.46,37.08 12.45,37.08 13.08,37.72 13.08,39.12 13.59,39.62 13.59,40.39 13.34,40.64 12.45,40.64 12.32,40.51 12.32,40.13 12.01,39.83 7.67,39.83 7.34,40.16 4.72,40.16
VPORT_5V0 on L3_PWR: 3.3,27.05 2.54,27.81 2.54,38.1 4.7,40.26 11.94,40.26 12.57,40.89 13.21,40.89 13.59,40.51 13.59,38.48 13.21,38.1 4.83,38.1 4.45,37.72 4.45,33.02 4.83,32.64 6.99,32.64 8.64,30.99 8.64,27.56 8.13,27.05

## Text on the board
User.14: NOTES:  UNLESS OTHERWISE SPECIFIED | 2.  ALL MATERIAL SHALL BE U. L. RECOGNIZED TO UL-94V2, OR BETTER | 9. ADD THIEVING ON ALL LAYERS KEEPING 50 MILS FROM ANY FEATURE | 3.  FINISH GOLD IMMERSION | 1.  MATERIAL FR408HR | 10. ALL VIA IN PAD INSTANCES IN THE AREA DESIGNED MUST BE PLUGGED PRIOR TO PLATING. | 4.  LIQUID PHOTO IMAGEABLE SOLDERMASK OVER BARE COPPER GREEN | 5.  SILKSCREEN WHITE | 6.  THIS IS CONTROLLED IMPEDANCE BOARD: SEE TABLE | 7.  VENDOR TO PROVIDE STACKUP FOR APPROVAL PRIOR TO FABRICATION | 8.  LAYER TO LAYER REGISTRATION NOT TO EXCEED .003 INCHES | ALL EDGE | R0.031 | COPPER THIEVING ON OUTER LAYERS MUST BE COVERED BY SOLDER MASK | ON THE SAME LAYER OR AN ADJACENT TRACE LAYERS. | THIEVING TO BE .03\ SQUARES ON .05\ CENTERS | NO "GANG RELIEF" FOR FINE PITCH COMPONENTS | TEADROP AT ALL CONNECTION POINTS | CORNERS | 7 X
User.36: LAYER STACKING DETAIL | Ref | Layer | 2 | 3 | Solder Mask BOTTOM | Solder Mask TOP | Thickness over Soldermask: | Thickness Over Copper: | Material Type | Plating | Layer # | 1 | 4 | ISOLA 370HR | Type | TOP | GND | PWR | BOT | Copper | Weight | (Oz) | 0.5 | 1.0 | 63 +/-6 | 63.30 | Thickness | (mil) | 1.35 | 0.80 | 0.65 | 1.30 | Material | Type - Ply | Prepreg | mil | Core | Dielectric | 47.00 | 4.3 | (Ohm) | 50 | Z0 | Trace | width | 6.5 | DIFF Z0 | 90 | 5 | 5.5 | Gap
User.37: FIGURE | SIZE | 10.0 | 15.0 | 37.0 | 54.0 | 91.0 | 129.0 | DRILL CHART: TOP to BOTTOM | ALL UNITS ARE IN MILS | TOLERANCE | +3.0/-10.0 | +3.0/-3.0 | +0.0/-0.0 | +3.0/-0.0 | PLATED | QTY | 224 | 5 | 16 | 12 | 2 | 4
